# Altium PCB NetworkModule_highspeed V4.PcbDoc (part 1 of 3)
Units mil, origin at the board's own origin, x right, y up, seen from the top; angles counter-clockwise.
Board outline 826.77 x 1421.26 mil, 6 copper layers (Top, GND, Inner3, Inner4, PWR, Bottom), stack 29.136 mil thick; 111 components, 125 nets, 539 pads, 464 vias.
Unrouted connection lines stored in the file: 214.
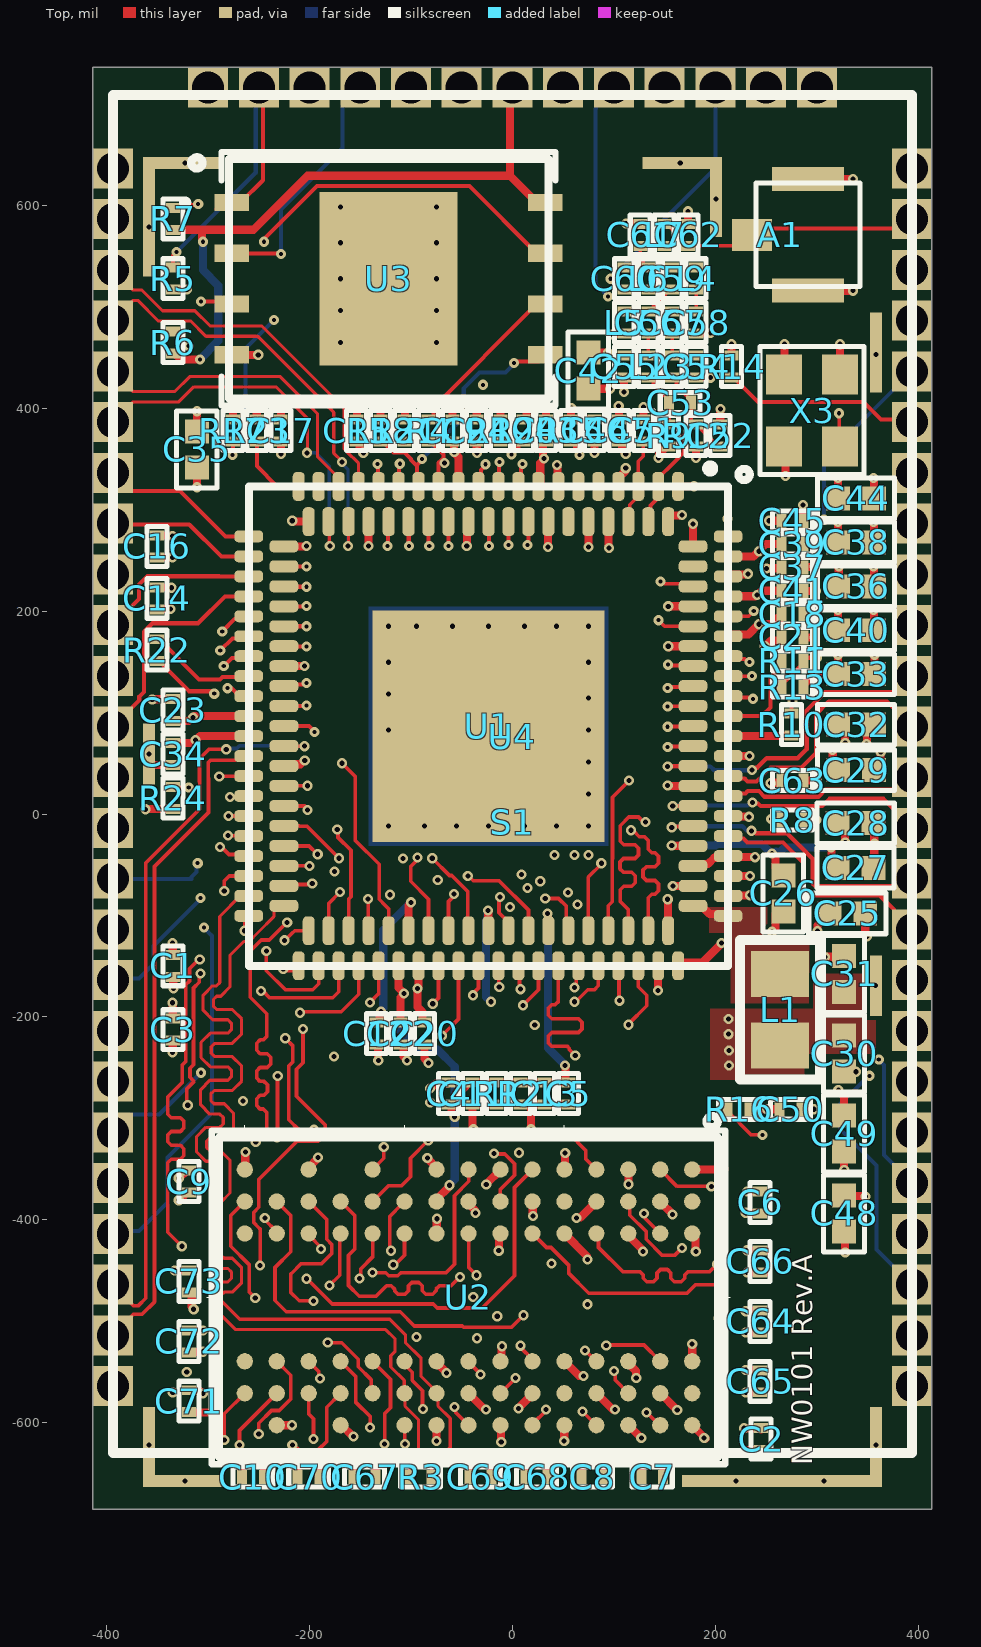
[diagram p0: Top view]
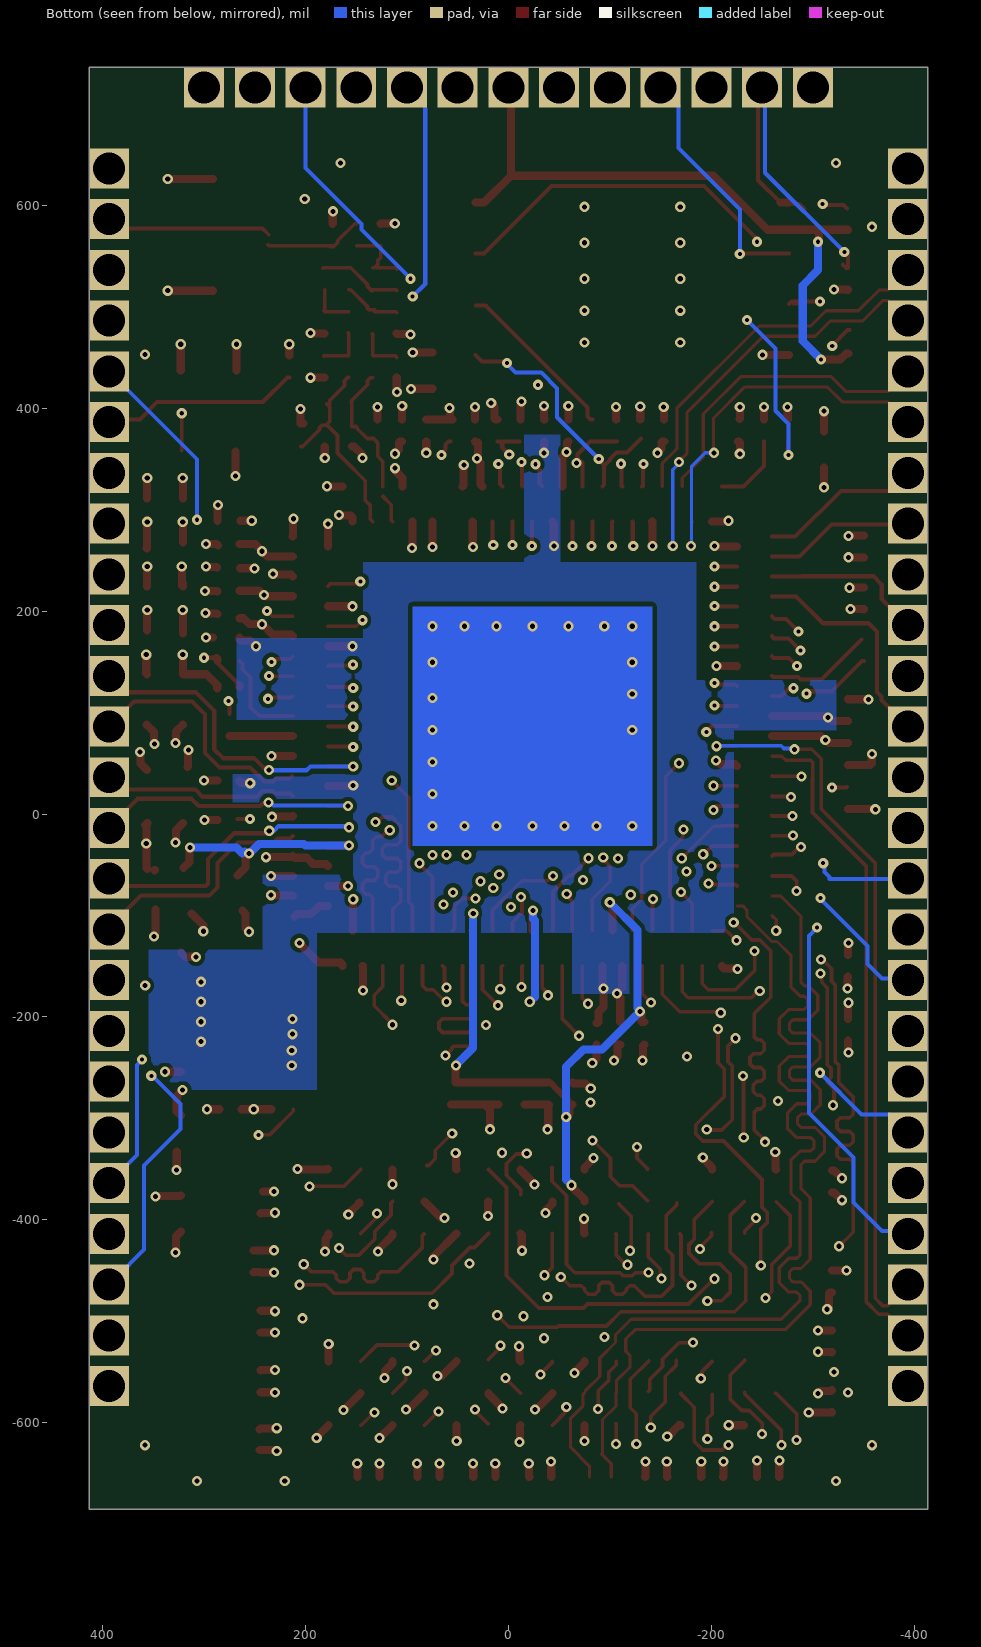
[diagram p1: Bottom view, seen from below]
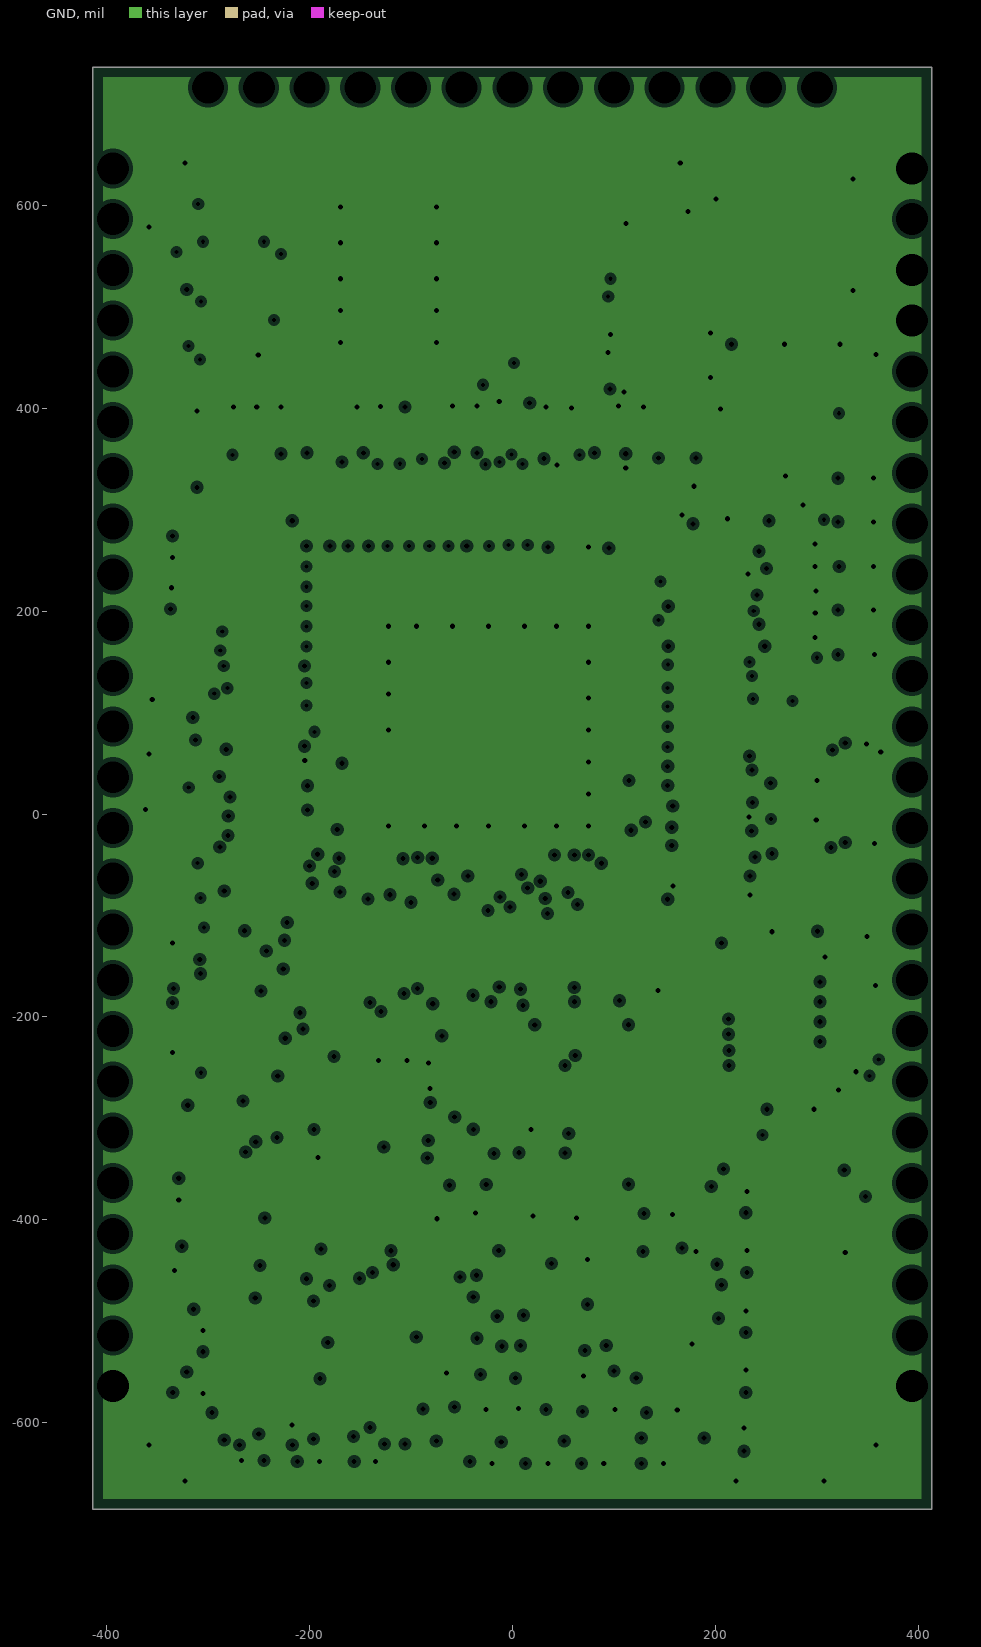
[diagram p2: GND, clearances drawn from the general rule]
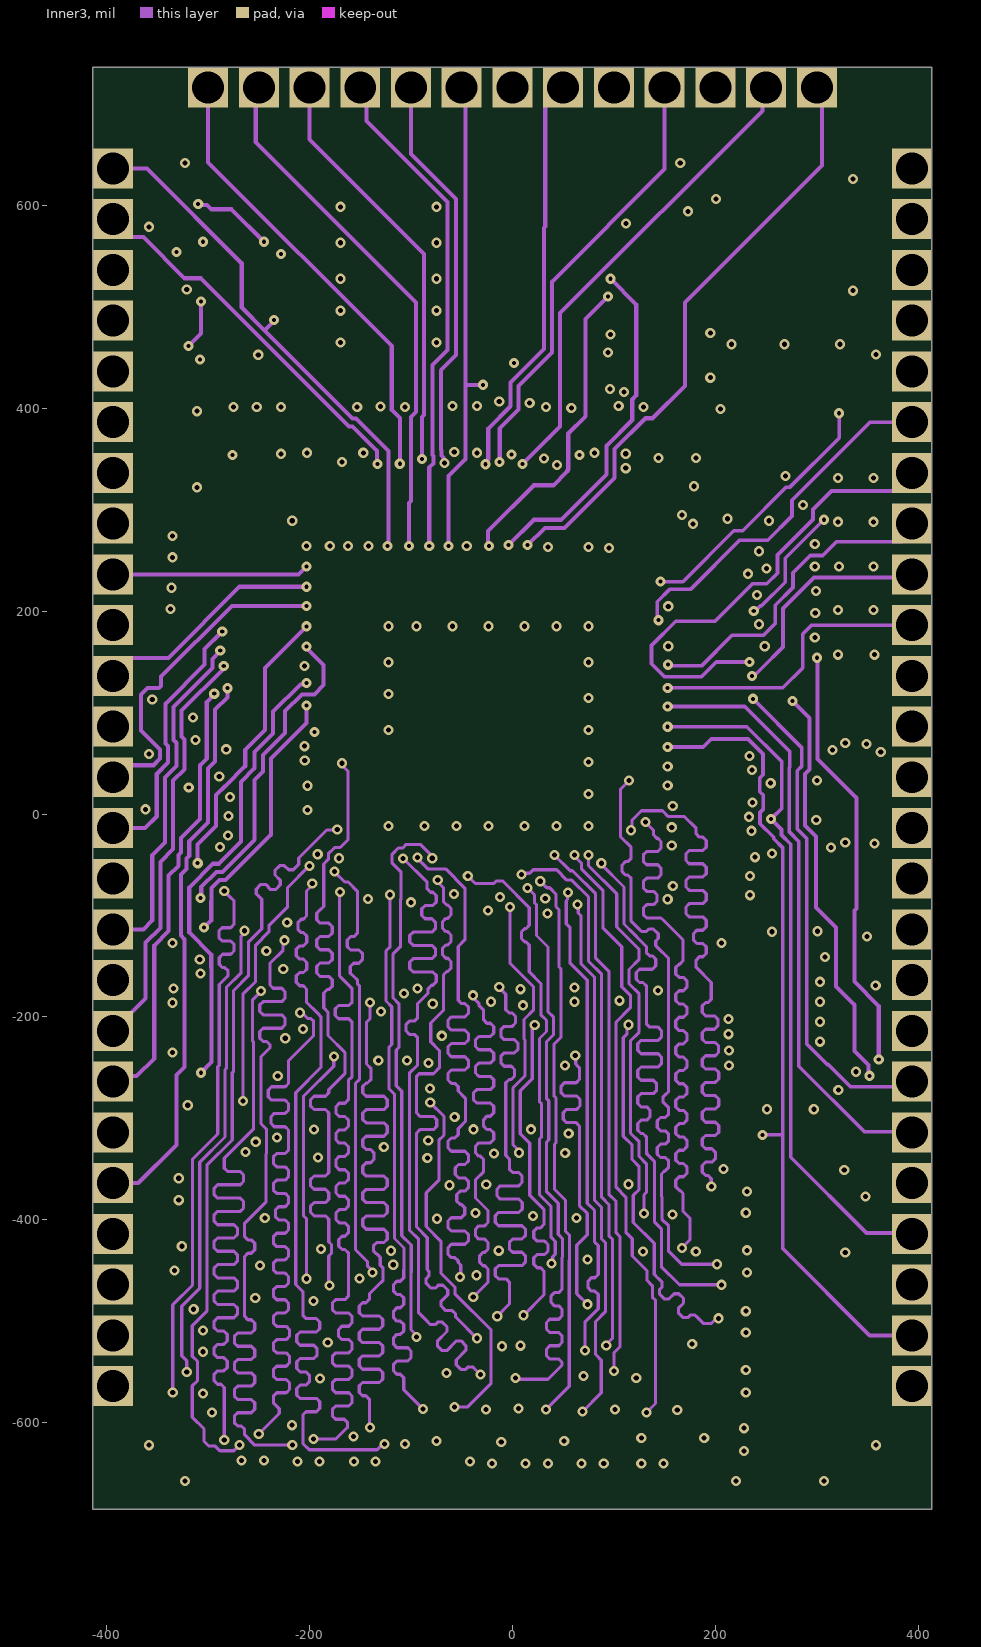
[diagram p3: Inner3]
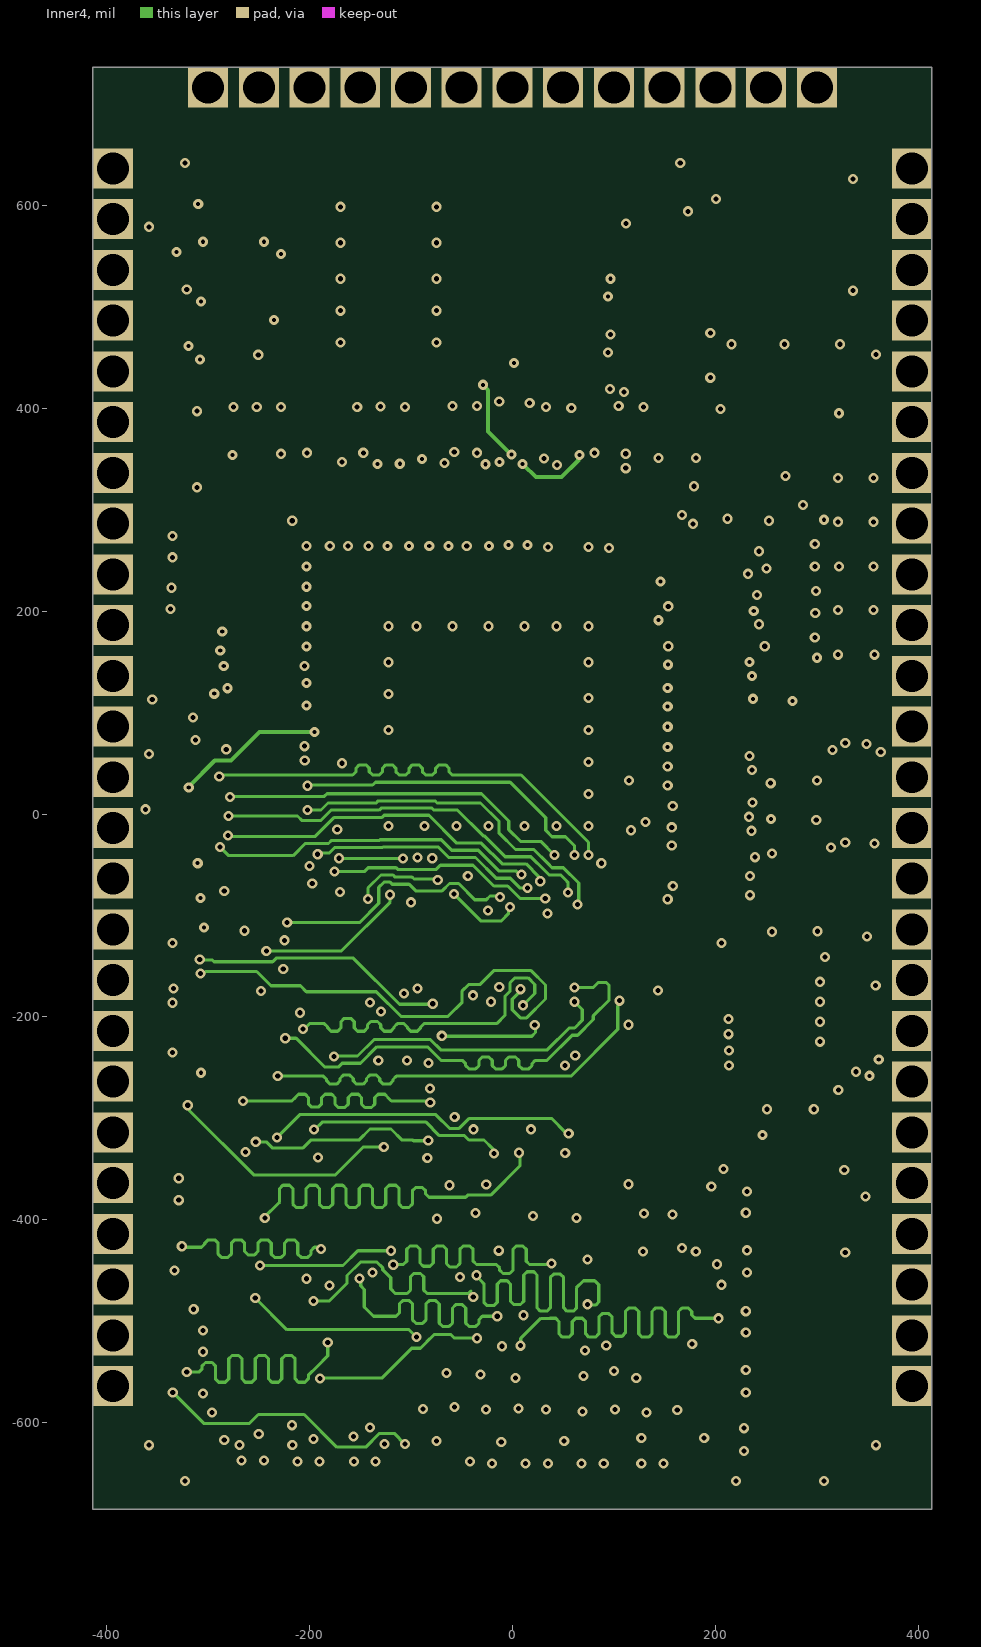
[diagram p4: Inner4]
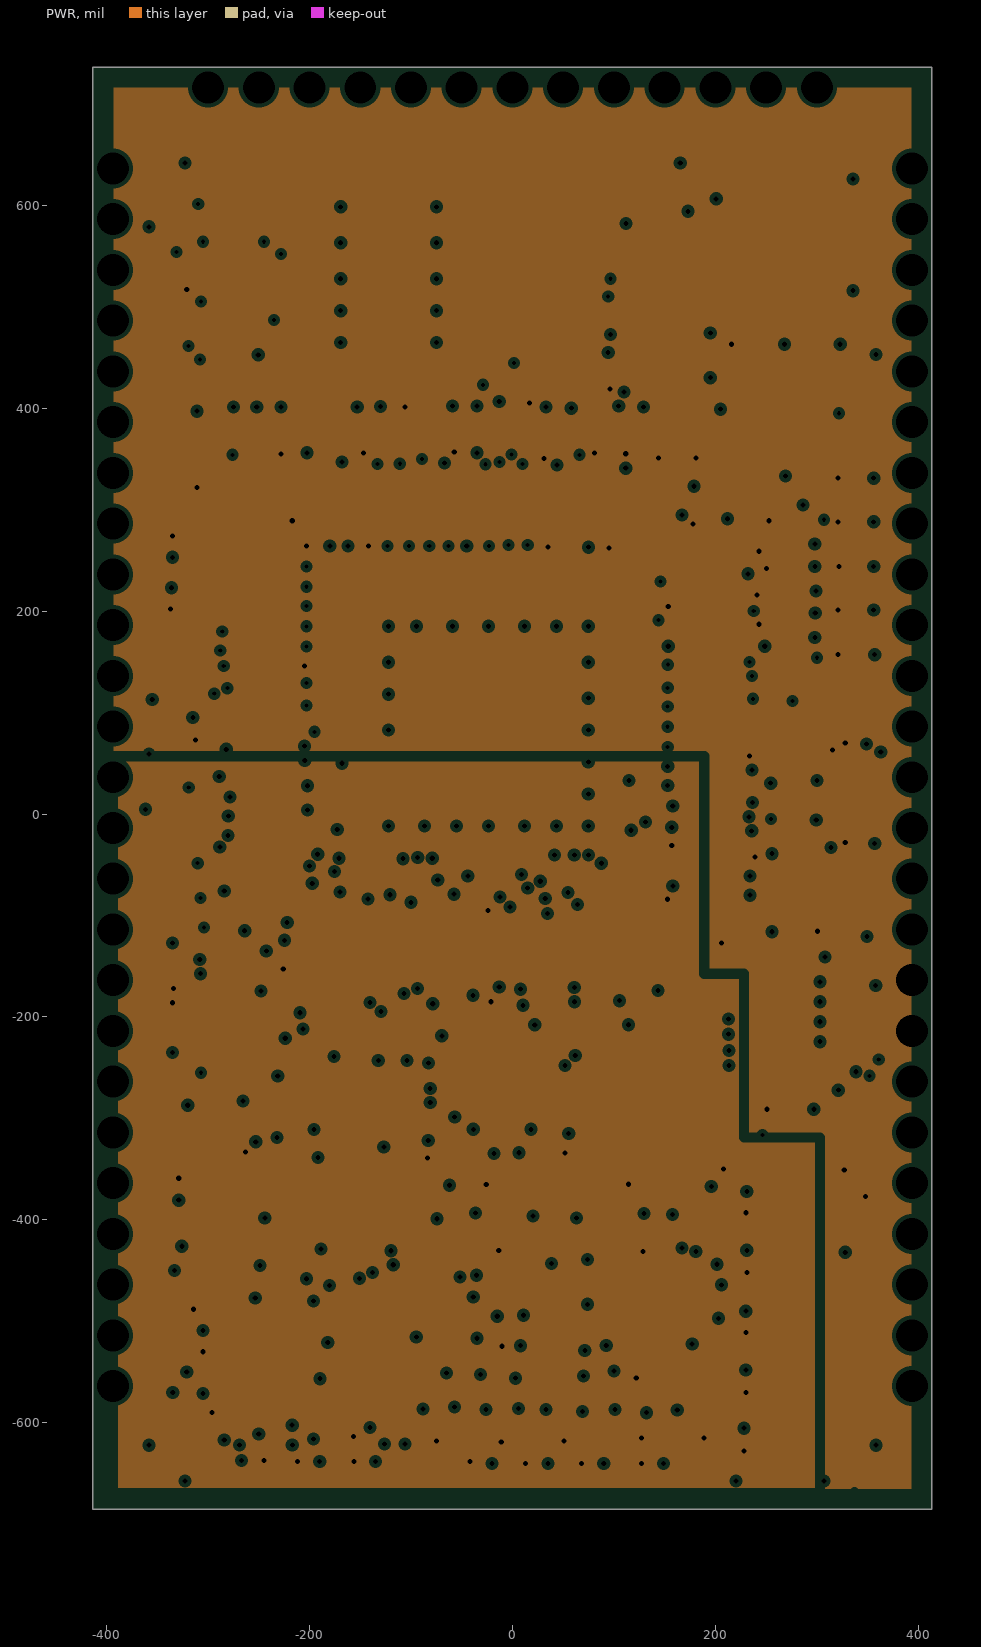
[diagram p5: PWR, clearances drawn from the general rule]

## Layer stack, top to bottom
Solder Mask Top: solder mask 0.4, Solder Resist, Dk 3.5
Top: signal copper 1.35
Dielectric 1: dielectric 2.362, FR-4, Dk 4.3
GND: plane copper 1.378, net GND
Dielectric2: dielectric 3.1, FR-4, Dk 4.3
Inner3: signal copper 1.378
Dielectric3: dielectric 10, FR-4, Dk 4.3
Inner4: signal copper 1.378
Dielectric4: dielectric 3.1, FR-4, Dk 4.3
PWR: plane copper 1.378, net 3V3
Dielectric5: dielectric 2.362, FR-4, Dk 4.3
Bottom: signal copper 1.35
Solder Mask Bottom: solder mask 0.4, Solder Resist, Dk 3.5

## Board outline
-413.39,736.22 413.39,736.22 413.39,-685.04 -413.39,-685.04

## Design rules (kind name [scope] priority, off if disabled: settings)
BoardOutlineClearance [All] p1: gap=4 ignorepadtopadclearanceinfootprint=FALSE
Clearance "Clearance - Default - DEFAULT - Net" [All] p1: gap=4 ignorepadtopadclearanceinfootprint=FALSE
ComponentClearance [All] p1: gap=0 collisioncheckmode=3 verticalgap=0 showdistances=FALSE
DiffPairsRouting "DiffPairsRouting - DiffPair - DDRCLK" [InDifferentialPair('DDRCLK')] p1: maxlimit=7 minlimit=5 mostfreqgap=5 toplayer_mingap=7 toplayer_prefgap=7 toplayer_minwidth=3.12 toplayer_maxwidth=3.12 toplayer_prefwidth=3.12 impedanceprofiledriven=TRUE impedanceprofileid={2A60CAE8-979D-4617-9CAD-F7D18D3C7651} impedanceprofilevalue=100.000000 maxuncoupledlength=500
DiffPairsRouting "DiffPairsRouting - DiffPair - ETH_R" [InDifferentialPair('ETH_R') or InDifferentialPair('ETH_T')] p2: maxlimit=7 minlimit=5 mostfreqgap=7 toplayer_mingap=7 toplayer_minwidth=3.12 toplayer_maxwidth=3.12 toplayer_prefwidth=3.12 bottomlayer_mingap=7 bottomlayer_minwidth=3.12 bottomlayer_maxwidth=3.12 bottomlayer_prefwidth=3.12 impedanceprofiledriven=TRUE impedanceprofileid={F7A5DDC0-C5B1-46B8-8866-6746753CC466} impedanceprofilevalue=100.000000 maxuncoupledlength=500
DiffPairsRouting "DiffPairsRouting - DiffPair - USB_D" [InDifferentialPair('USB')] p3: maxlimit=5 minlimit=4.5 mostfreqgap=5 toplayer_mingap=5 toplayer_minwidth=3.6 toplayer_maxwidth=3.6 toplayer_prefwidth=3.6 impedanceprofiledriven=TRUE impedanceprofileid={C5FCCC38-FD2C-4A72-8F5C-545B132D70D5} impedanceprofilevalue=90.000000 maxuncoupledlength=500
DiffPairsRouting "DiffPairsRouting - DiffPair - PCIE" [InDifferentialPair('PCIE_R') or InDifferentialPair('PCIE_T') or InDifferentialPair('PCIE_CLK')] p4: maxlimit=5 minlimit=4 mostfreqgap=5 toplayer_mingap=5 toplayer_minwidth=4.09 toplayer_maxwidth=4.09 toplayer_prefwidth=4.09 bottomlayer_mingap=5 bottomlayer_minwidth=4.08 bottomlayer_maxwidth=4.08 bottomlayer_prefwidth=4.08 impedanceprofiledriven=TRUE impedanceprofileid={683894AC-71DA-4711-AA13-E03A25D4E6CD} impedanceprofilevalue=85.000000 maxuncoupledlength=500
HoleSize [All] p1: absolutevalues=TRUE maxlimit=100 minlimit=4 maxpercent=80.000 minpercent=20.000
HoleToHoleClearance "HoleToHoleClearance - Default - DEFAULT" [All] p1: gap=4 allowstackedmicrovias=TRUE
MatchedLengths [InNetClass('DDR')] p1: tolerance=100 checknetsindiffpair=FALSE checkdiffpairvsdiffpair=TRUE checkxsignals=TRUE checkothers=TRUE
MinimumSolderMaskSliver [All] p1: minsoldermaskwidth=3
PlaneClearance [All] p1: clearance=4
PlaneConnect "Default PlaneConnect" [All] p1: planeconnectstyle=Direct reliefexpansion=20 reliefentries=4 reliefconductorwidth=15 reliefairgap=10
PolygonConnect "PolygonConnect - Default SMT" [IsSMTPin] p1: connectstyle=Direct reliefconductorwidth=10 reliefentries=4 polygonreliefangle="45 Angle" airgapwidth=10
PolygonConnect "PolygonConnect - Default Pad" [All] p2: connectstyle=Direct reliefconductorwidth=15 reliefentries=4 polygonreliefangle="45 Angle" airgapwidth=10
ReturnPath "ReturnPath - DDRCLK" [InNetClass('DDRCLK')] p1: impedanceprofileid={2A60CAE8-979D-4617-9CAD-F7D18D3C7651} _gaplimit=0
ReturnPath ReturnPath-DDR [All] p2: impedanceprofileid={722ABB41-7FFB-403E-9E2B-BB6A49F0BD66} _gaplimit=0
ReturnPath "ReturnPath - RF" [All] p3: impedanceprofileid={3401BA53-1A97-405B-B9A4-8C0F8181F371} _gaplimit=0
ReturnPath "ReturnPath - USB" [All] p4: impedanceprofileid={C5FCCC38-FD2C-4A72-8F5C-545B132D70D5} _gaplimit=0
ReturnPath "ReturnPath - PCIE" [All] p5: impedanceprofileid={683894AC-71DA-4711-AA13-E03A25D4E6CD} _gaplimit=0
ReturnPath "ReturnPath - Eth" [InNetClass('ETH')] p6: impedanceprofileid={F7A5DDC0-C5B1-46B8-8866-6746753CC466} _gaplimit=5
RoutingLayers "RoutingLayers - USB" [InNetClass('USB')] p1: top layer_v5=TRUE mid layer 1_v5=FALSE mid layer 2_v5=FALSE bottom layer_v5=TRUE
RoutingLayers "RoutingLayers - PCIE" [InNetClass('PCIE')] p2: top layer_v5=TRUE mid layer 1_v5=FALSE mid layer 2_v5=FALSE bottom layer_v5=TRUE
RoutingLayers "RoutingLayers - DDRCLK" [InNetClass('DDRCLK')] p3: top layer_v5=TRUE mid layer 1_v5=TRUE mid layer 2_v5=TRUE bottom layer_v5=TRUE
RoutingLayers "RoutingLayers - NetClass - RF" [InNetClass('RF')] p4: top layer_v5=TRUE mid layer 1_v5=FALSE mid layer 2_v5=FALSE bottom layer_v5=FALSE
RoutingLayers "RoutingLayers - NetClass - DDR" [InNetClass('DDR')] p5: top layer_v5=TRUE mid layer 1_v5=TRUE mid layer 2_v5=TRUE bottom layer_v5=TRUE
RoutingLayers "RoutingLayers - ETH" [InNetClass('ETH')] p6: top layer_v5=TRUE mid layer 1_v5=FALSE mid layer 2_v5=FALSE bottom layer_v5=TRUE
RoutingLayers "RoutingLayers - NetClass - Power" [InNetClass('Power')] p7: top layer_v5=TRUE mid layer 1_v5=FALSE mid layer 2_v5=FALSE bottom layer_v5=TRUE
RoutingLayers "RoutingLayers - Net - GND" [InNet('GND')] p8: top layer_v5=TRUE mid layer 1_v5=FALSE mid layer 2_v5=FALSE bottom layer_v5=FALSE
RoutingLayers "RoutingLayers - Default" [All] p9: top layer_v5=TRUE mid layer 1_v5=TRUE mid layer 2_v5=TRUE bottom layer_v5=TRUE
RoutingPriority "RoutingPriority - PCIE" [InNetClass('PCIE')] p1: routingpriority=5
RoutingPriority "RoutingPriority - USB" [InNetClass('USB')] p2: routingpriority=5
RoutingPriority "RoutingPriority - ETH" [InNetClass('ETH')] p3: routingpriority=5
RoutingPriority "RoutingPriority - DDRCLK" [InNetClass('DDRCLK')] p4: routingpriority=5
RoutingPriority "RoutingPriority - DDR" [InNetClass('DDR')] p5: routingpriority=3
RoutingPriority "RoutingPriority - Default" [All] p6: routingpriority=0
RoutingVias "RoutingVias - Default" [All] p1: holewidth=4 width=10 viastyle="Through Hole" minholewidth=4 minwidth=10 maxholewidth=4 maxwidth=10
SolderMaskExpansion "SolderMaskExpansion from CAM settings" [All] p1: expansion=2 istentingtop=FALSE
Width "Width - NetClass -RF" [InNetClass('RF')] p1: maxlimit=6 minlimit=3 preferedwidth=10 toplayer_prefwidth=3.63 impedanceprofiledriven=TRUE impedanceprofileid={3401BA53-1A97-405B-B9A4-8C0F8181F371} impedanceprofilevalue=50.000000 minimp=50.000000 maximp=50.000000 favimp=50.000000
Width "Width - NetClass - DDR" [InNetClass('DDR')] p2: maxlimit=6 minlimit=3 preferedwidth=3.63 toplayer_minwidth=3.63 toplayer_maxwidth=3.63 midlayer1_minwidth=3.1 midlayer1_maxwidth=3.1 midlayer1_prefwidth=3.1 midlayer2_minwidth=3.09 midlayer2_maxwidth=3.09 midlayer2_prefwidth=3.09 impedanceprofiledriven=TRUE impedanceprofileid={722ABB41-7FFB-403E-9E2B-BB6A49F0BD66} impedanceprofilevalue=50.000000 minimp=50.000000 maximp=50.000000 favimp=50.000000
Width "Width - Net - GND" [InNet('GND')] p3: maxlimit=10 minlimit=4 preferedwidth=8 minimp=50.000000 maximp=50.000000 favimp=50.000000
Width "Width - NetClass - Power" [InNetClass('Power')] p4: maxlimit=10 minlimit=4 preferedwidth=8 minimp=50.000000 maximp=50.000000 favimp=50.000000
Width "Width - DEFAULT" [All] p5: maxlimit=10 minlimit=3 preferedwidth=4 minimp=50.000000 maximp=50.000000 favimp=50.000000
21 further rules are at their usual default settings.

## Classes and differential pairs
component class BGA: U2
net class DDRCLK: DDR_CLK_N DDR_CLK_P
net class ETH: ETH_RN ETH_RP ETH_TN ETH_TP
net class PCIE: PCIE_CKN PCIE_CKP PCIE_RXN PCIE_RXP PCIE_TXN PCIE_TXP
net class USB: USB_D+ USB_D-
net class DDR: DDR_A0 DDR_A1 DDR_A2 DDR_A3 DDR_A4 DDR_A5 DDR_A6 DDR_A7 DDR_A8 DDR_A9 DDR_A10 DDR_A11 DDR_A12 DDR_A13 DDR_BA0 DDR_BA1 DDR_BA2 DDR_CAS DDR_CKE DDR_CS DDR_D0 DDR_D1 DDR_D2 DDR_D3 DDR_D4 DDR_D5 DDR_D6 DDR_D7 DDR_D8 DDR_D9 DDR_D10 DDR_D11 DDR_D12 DDR_D13 DDR_D14 DDR_D15 DDR_LDM DDR_LDQS DDR_ODT DDR_RAS DDR_UDM DDR_UDQS DDR_WE
net class RF: ANT_OUT RF_DIFF+ RF_DIFF- RF_HP+ RF_HP- RF_LP RF_LP+ RF_LP- RF_NOTCH
net class Power: 1V2 1V8 3V3 DDR_1V8 DDR_VREF LXBK VDD_FLASH
component class WIFI: A1 C36 C37 C38 C39 C40 C41 C42 C43 C44 C45 C46 C47 C48 C49 C50 C51 C52 C53 C54 C55 C56 C57 C58 C59 C60 C61 C62 L2 L3 L4 L5 L6 L7 R9 R12 X3
component class USB_PCIE: C32 C33 C34 C35 C63 R16 R24
component class POWER: C18 C19 C20 C21 C22 C23 C24 C25 C27 C28 C29 C30 C31 L1 U1
component class MISC: R4 R5 R7 R8 R10 R11 R13 R14 R15 R17 R18 R19 R20 R21 U3
component class MEMORY: C1 C2 C3 C5 C6 C7 C8 C9 C10 C11 C64 C65 C66 C67 C68 C69 C70 C71 C72 C73 R1 R2 R3 U2
component class INTERFACE: U4
component class ETH_JTAG_SD: C14 C15 C16 C17 R22 R23
differential pair PCIE_CLK: +PCIE_CKP -PCIE_CKN
differential pair PCIE_R: +PCIE_RXP -PCIE_RXN
differential pair PCIE_T: +PCIE_TXP -PCIE_TXN
differential pair DDRCLK: +DDR_CLK_P -DDR_CLK_N
differential pair ETH_R: +ETH_RP -ETH_RN
differential pair ETH_T: +ETH_TP -ETH_TN
differential pair USB: +USB_D+ -USB_D-

## Components (designator, comment, footprint, x,y, rotation, side; value= is the part's Value field where it differs from the comment)
A1 "CONMHF1-SMD-G-T" CONMHF1-SMD-G-T 291.34,570.87 r0 top locked
C1 "CAP0201-104-16V-X7R" RC0201 -334.65,-149.61 r90 top value="0.1uF 16V X7R"
C2 "CAP0201-104-16V-X7R" RC0201 245.08,-616.14 r90 top value="0.1uF 16V X7R"
C3 "CAP0201-104-16V-X7R" RC0201 -334.65,-212.6 r270 top value="0.1uF 16V X7R"
C4 "CAP0201-104-16V-X7R" RC0201 -62.99,-275.59 r90 top value="0.1uF 16V X7R"
C5 "CAP0201-104-16V-X7R" RC0201 55.12,-275.59 r270 top value="0.1uF 16V X7R"
C6 "CAP0201-104-16V-X7R" RC0201 244.09,-382.87 r90 top value="0.1uF 16V X7R"
C7 "CAP0201-104-16V-X7R" RC0201 137.8,-653.54 r0 top value="0.1uF 16V X7R"
C8 "CAP0201-104-16V-X7R" RC0201 78.74,-653.54 r0 top value="0.1uF 16V X7R"
C9 "CAP0201-104-16V-X7R" RC0201 -318.9,-362.2 r270 top value="0.1uF 16V X7R"
C10 "CAP0201-104-16V-X7R" RC0201 -255.91,-653.54 r180 top value="0.1uF 16V X7R"
C11 "CAP0201-104-16V-X7R" RC0201 -39.37,-275.59 r90 top value="0.1uF 16V X7R"
C12 "CAP0201-104-16V-X7R" RC0201 -133.86,-216.54 r270 top value="0.1uF 16V X7R"
C13 "CAP0201-104-16V-X7R" RC0201 31.5,-275.59 r270 top value="0.1uF 16V X7R"
C14 "CAP0201-104-16V-X7R" RC0201 -350.39,212.6 r90 top value="0.1uF 16V X7R"
C15 "CAP0201-104-16V-X7R" RC0201 -153.54,377.95 r90 top value="0.1uF 16V X7R"
C16 "CAP0201-104-16V-X7R" RC0201 -350.39,263.78 r270 top value="0.1uF 16V X7R"
C17 "CAP0201-104-16V-X7R" RC0201 -228.35,377.95 r90 top value="0.1uF 16V X7R"
C18 "CAP0201-104-16V-X7R" RC0201 276,197 r0 top value="0.1uF 16V X7R"
C19 "CAP0201-104-16V-X7R" RC0201 -59.06,377.95 r90 top value="0.1uF 16V X7R"
C20 "CAP0201-104-16V-X7R" RC0201 -86.61,-216.54 r270 top value="0.1uF 16V X7R"
C21 "CAP0201-104-16V-X7R" RC0201 276,174 r0 top value="0.1uF 16V X7R"
C22 "CAP0201-104-16V-X7R" RC0201 -110.24,-216.54 r270 top value="0.1uF 16V X7R"
C23 "CAP0201-104-16V-X7R" RC0201 -334.65,102.36 r90 top value="0.1uF 16V X7R"
C24 "CAP0201-104-16V-X7R" RC0201 -35.43,377.95 r90 top value="0.1uF 16V X7R"
C25 "CAP0402-105-6.3V-X7R" RC0402 330,-98 r0 top value="1uF 16V X7R"
C26 "CAP0402-475-10V-X5R" RC0402 267,-78.28 r270 top value="4.7uF 10V X5R"
C27 "CAP0402-105-6.3V-X7R" RC0402 338,-53 r0 top value="1uF 16V X7R"
C28 "CAP0402-105-6.3V-X7R" RC0402 338.28,-9 r0 top value="1uF 16V X7R"
C29 "CAP0402-105-6.3V-X7R" RC0402 338.58,43.31 r0 top value="1uF 16V X7R"
C30 "CAP0402-475-10V-X5R" RC0402 326.77,-236.22 r270 top value="4.7uF 10V X5R"
C31 "CAP0402-475-10V-X5R" RC0402 326.77,-157.48 r90 top value="4.7uF 10V X5R"
C32 "CAP0402-475-10V-X5R" RC0402 338.72,88 r0 top value="4.7uF 10V X5R"
C33 "CAP0402-475-10V-X5R" RC0402 338.58,137.8 r0 top value="4.7uF 10V X5R"
C34 "CAP0201-104-16V-X7R" RC0201 -334.65,59.06 r270 top value="0.1uF 16V X7R"
C35 "CAP0402-475-10V-X5R" RC0402 -311,359.28 r90 top value="4.7uF 10V X5R"
C36 "CAP0402-105-6.3V-X7R" RC0402 338.58,224.41 r0 top value="1uF 16V X7R"
C37 "CAP0201-101-16V-X7R" RC0201 276,243 r0 top value="100pF 16V X7R"
C38 "CAP0402-105-6.3V-X7R" RC0402 338.58,267.72 r0 top value="1uF 16V X7R"
C39 "CAP0201-101-16V-X7R" RC0201 276,266 r0 top value="100pF 16V X7R"
C40 "CAP0402-105-6.3V-X7R" RC0402 338.58,181.1 r0 top value="1uF 16V X7R"
C41 "CAP0201-101-16V-X7R" RC0201 276,220 r0 top value="100pF 16V X7R"
C42 "CAP0402-105-6.3V-X7R" RC0402 74.8,437.01 r90 top value="1uF 16V X7R"
C43 "CAP0201-101-16V-X7R" RC0201 33,378 r90 top value="100pF 16V X7R"
C44 "CAP0402-105-6.3V-X7R" RC0402 338.58,311.02 r0 top value="1uF 16V X7R"
C45 "CAP0201-101-16V-X7R" RC0201 276,289 r0 top value="100pF 16V X7R"
C46 "CAP0201-101-16V-X7R" RC0201 81,378 r90 top value="100pF 16V X7R"
C47 "CAP0201-101-16V-X7R" RC0201 105,378 r90 top value="100pF 16V X7R"
C48 "CAP0402-105-6.3V-X7R" RC0402 326.77,-393.7 r270 top value="1uF 16V X7R"
C49 "CAP0402-475-10V-X5R" RC0402 326.77,-314.96 r90 top value="4.7uF 10V X5R"
C50 "CAP0201-100-25V-NP0" RC0201 274,-291 r0 top value="10pF 25V NP0"
C51 "CAP0201-020-25V-NP0" RC0201 129,378 r270 top value="2pF 25V NP0"
C52 "CAP0201-020-25V-NP0" RC0201 204.72,373 r90 top value="2pF 25V NP0"
C53 "CAP0201-NOP" RC0201 165.35,405.51 r0 top value=NOP
C54 "CAP0201-NOP" RC0201 181.1,440.94 r270 top value=NOP
C55 "CAP0201-NOP" RC0201 110.24,440.94 r270 top value=NOP
C56 "CAP0201-100-25V-NP0" RC0201 133.86,484.25 r270 top value="10pF 25V NP0"
C57 "CAP0201-100-25V-NP0" RC0201 157.48,484.25 r270 top value="10pF 25V NP0"
C58 "CAP0201-1R2-25V-NP0" RC0201 181.1,484.25 r270 top value="1.2PF 25V NP0"
C59 "CAP0201-1R2-25V-NP0" RC0201 157.48,527.56 r270 top value="1.2PF 25V NP0"
C60 "CAP0201-090-100V-NP0" RC0201 110.24,527.56 r270 top value="9pF 25V NP0"
C61 "CAP0201-020-25V-NP0" RC0201 125.98,570.87 r90 top value="2pF 25V NP0"
C62 "CAP0201-020-25V-NP0" RC0201 173.23,570.87 r90 top value="2pF 25V NP0"
C63 "CAP0201-104-16V-X7R" RC0201 276,33 r180 top value="0.1uF 16V X7R"
C64 "CAP0201-104-16V-X7R" RC0201 244.09,-500 r90 top value="0.1uF 16V X7R"
C65 "CAP0201-104-16V-X7R" RC0201 244.09,-559.06 r90 top value="0.1uF 16V X7R"
C66 "CAP0201-104-16V-X7R" RC0201 244.09,-440.94 r90 top value="0.1uF 16V X7R"
C67 "CAP0201-104-16V-X7R" RC0201 -145.67,-653.54 r0 top value="0.1uF 16V X7R"
C68 "CAP0201-104-16V-X7R" RC0201 23.62,-653.54 r0 top value="0.1uF 16V X7R"
C69 "CAP0201-104-16V-X7R" RC0201 -31.5,-653.54 r0 top value="0.1uF 16V X7R"
C70 "CAP0201-104-16V-X7R" RC0201 -200.79,-653.54 r0 top value="0.1uF 16V X7R"
C71 "CAP0201-104-16V-X7R" RC0201 -318.9,-578.74 r90 top value="0.1uF 16V X7R"
C72 "CAP0201-104-16V-X7R" RC0201 -318.9,-519.68 r90 top value="0.1uF 16V X7R"
C73 "CAP0201-104-16V-X7R" RC0201 -318.9,-460.63 r90 top value="0.1uF 16V X7R"
L1 "IND0805_2.2U_1.9A" RC0805 263.78,-192.91 r270 top value="2.2uH 1.9A"
L2 "IND0201_1.5N_600MA" RC0201 133.86,440.94 r90 top value=1.5nH
L3 "IND0201_1.5N_600MA" RC0201 157.48,440.94 r90 top value=1.5nH
L4 "IND0201_2.5N_500MA" RC0201 181.1,527.56 r90 top value=2.5nH
L5 "IND0201_2.5N_500MA" RC0201 110.24,484.25 r270 top value=2.5nH
L6 "IND0201_1.8N_200MA" RC0201 133.86,527.56 r90 top value="1.8nH 200mA"
L7 "IND0201_1.5N_600MA" RC0201 149.61,570.87 r90 top value=1.5nH
R1 "RES0201-1K00" RC0201 -15.75,-275.59 r270 top value="1K00 1% 1/20W"
R2 "RES0201-1K00" RC0201 7.87,-275.59 r90 top value="1K00 1% 1/20W"
R3 "RES0201-100R" RC0201 -90.55,-653.54 r0 top value="100R 1% 1/20W"
R4 "RES0201-22R0" RC0201 -82.68,377.95 r90 top value="22R0 1% 1/20W"
R5 "RES0201-4K70" RC0201 -334.65,527.56 r270 top value="4K70 1% 1/20W"
R6 "RES0201-10K0" RC0201 -334.65,464.57 r270 top value="10K0 1% 1/20W"
R7 "RES0201-10K0" RC0201 -334.65,586.61 r270 top value="10K0 1% 1/20W"
R8 "RES0201-4K70" RC0201 276,-6 r180 top value="4K70 1% 1/20W"
R9 "RES0201-50R0" RC0201 154,372.99 r270 top value="50R 1% 0.075W"
R10 "RES0201-22R0" RC0201 275,88 r270 top value="22R0 1% 1/20W"
R11 "RES0201-22R0" RC0201 276,151 r0 top value="22R0 1% 1/20W"
R12 "RES0201-50R0" RC0201 181.1,373 r270 top value="50R 1% 0.075W"
R13 "RES0201-10K0" RC0201 275.89,125 r0 top value="10K0 1% 1/20W"
R14 "RES0201-4K70" RC0201 216,441 r90 top value="4K70 1% 1/20W"
R15 "RES0201-4K70" RC0201 57,378 r270 top value="4K70 1% 1/20W"
R16 "RES0201-10K0" RC0201 223,-291 r0 top value="10K0 1% 1/20W"
R17 "RES0201-4K70" RC0201 -275.59,377.95 r270 top value="4K70 1% 1/20W"
R18 "RES0201-4K70" RC0201 -129.92,377.95 r270 top value="4K70 1% 1/20W"
R19 "RES0201-NOP" RC0201 -11.81,377.95 r270 top value=NOP
R20 "RES0201-4K70" RC0201 11,378 r270 top value="4K70 1% 1/20W"
R21 "RES0201-4K70" RC0201 -106.3,377.95 r270 top value="4K70 1% 1/20W"
R22 "RES0201-22R0" RC0201 -350.39,161.42 r90 top value="22R0 1% 1/20W"
R23 "RES0201-24K3" RC0201 -251.97,377.95 r90 top value="24K3 1% 1/20W"
R24 "RES0201-5K10" RC0201 -334.65,15.75 r270 top value="5K10 1% 1/20W"
S1 "O2S-SHIELD" O2S-SHIELD 3.94,-3.94 r0 top locked
U1 "MT7688AN" DR-QFN-128 -23.62,86.61 r270 top locked
U2 "W971GG6KB" TWBGA-84_8X12P5_ISI -43.31,-476.38 r270 top locked
U3 "W25Q256" WIN_E-8_WIN -122.05,527.56 r0 top locked
U4 "OMEGA2S-PCB" OMEGA2S+PCB 0,236.22 r0 top locked
X3 "R2520-40.000-12-F-1010-TR-NS1" R2520-40.000-12-F-1010-TR-NS1 295.28,397.64 r270 top value=40Mhz

## Footprints (in the part's own frame and the unit in brackets; to place one, negate y for a bottom-side part, rotate by r counter-clockwise, add the part's x,y. Pads: shape width x height; smd on the part's side, far side on the other; paste and mask are expansions set on the pad)
CONMHF1-SMD-G-T [mm]
  rect 1x0.8 smd: 1(-1.4,0)
  rect 1.8x0.6 smd: 2(0,-1.4) 3(0,1.4)
  silkscreen extent -1.3,-1.3 1.3,1.3
DR-QFN-128 [mm]
  rrect70% 0.72x0.3 smd: 1(-6,4.75) 2(-5.12,4.5) 3(-6,4.25) 4(-5.12,4) 5(-6,3.75) 6(-5.12,3.5) 7(-6,3.25) 8(-5.12,3) 9(-6,2.75) 10(-5.12,2.5) 11(-6,2.25) 12(-5.12,2) 13(-6,1.75) 14(-5.12,1.5) 15(-6,1.25) 16(-5.12,1) 17(-6,0.75) 18(-5.12,0.5) 19(-6,0.25) 20(-5.12,0) 21(-6,-0.25) 22(-5.12,-0.5) 23(-6,-0.75) 24(-5.12,-1) 25(-6,-1.25) 26(-5.12,-1.5) 27(-6,-1.75) 28(-5.12,-2) 29(-6,-2.25) 30(-5.12,-2.5) 31(-6,-2.75) 32(-5.12,-3) 33(-6,-3.25) 34(-5.12,-3.5) 35(-6,-3.75) 36(-5.12,-4) 37(-6,-4.25) 38(-5.12,-4.5) 39(-6,-4.75)
  rrect70% 0.3x0.72 smd: 40(-4.75,-6) 41(-4.5,-5.12) 42(-4.25,-6) 43(-4,-5.12) 44(-3.75,-6) 45(-3.5,-5.12) 46(-3.25,-6) 47(-3,-5.12) 48(-2.75,-6) 49(-2.5,-5.12) 50(-2.25,-6) 51(-2,-5.12) 52(-1.75,-6) 53(-1.5,-5.12) 54(-1.25,-6) 55(-1,-5.12) 56(-0.75,-6) 57(-0.5,-5.12) 58(-0.25,-6) 59(0,-5.12) 60(0.25,-6) 61(0.5,-5.12) 62(0.75,-6) 63(1,-5.12) 64(1.25,-6) 65(1.5,-5.12) 66(1.75,-6) 67(2,-5.12) 68(2.25,-6) 69(2.5,-5.12) 70(2.75,-6) 71(3,-5.12) 72(3.25,-6) 73(3.5,-5.12) 74(3.75,-6) 75(4,-5.12) 76(4.25,-6) 77(4.5,-5.12) 78(4.75,-6) 118(4.75,6) 119(4.5,5.12) 120(4.25,6) 121(4,5.12) 122(3.75,6) 123(3.5,5.12) 124(3.25,6) 125(3,5.12) 126(2.75,6) 127(2.5,5.12) 128(2.25,6) 129(2,5.12) 130(1.75,6) 131(1.5,5.12) 132(1.25,6) 133(1,5.12) 134(0.75,6) 135(0.5,5.12) 136(0.25,6) 137(0,5.12) 138(-0.25,6) 139(-0.5,5.12) 140(-0.75,6) 141(-1,5.12) 142(-1.25,6) 143(-1.5,5.12) 144(-1.75,6) 145(-2,5.12) 146(-2.25,6) 147(-2.5,5.12) 148(-2.75,6) 149(-3,5.12) 150(-3.25,6) 151(-3.5,5.12) 152(-3.75,6) 153(-4,5.12) 154(-4.25,6) 155(-4.5,5.12) 156(-4.75,6)
  rrect70% 0.72x0.3 smd rot 179.99: 79(6,-4.75) 80(5.12,-4.5) 81(6,-4.25) 82(5.12,-4) 83(6,-3.75) 84(5.12,-3.5) 85(6,-3.25) 86(5.12,-3) 87(6,-2.75) 88(5.12,-2.5) 89(6,-2.25) 90(5.12,-2) 91(6,-1.75) 92(5.12,-1.5) 93(6,-1.25) 94(5.12,-1) 95(6,-0.75) 96(5.12,-0.5) 97(6,-0.25) 98(5.12,0) 99(6,0.25) 100(5.12,0.5) 101(6,0.75) 102(5.12,1) 103(6,1.25) 104(5.12,1.5) 105(6,1.75) 106(5.12,2) 107(6,2.25) 108(5.12,2.5) 109(6,2.75) 110(5.12,3) 111(6,3.25) 112(5.12,3.5) 113(6,3.75) 114(5.12,4) 115(6,4.25) 116(5.12,4.5) 117(6,4.75)
  rrect0% 5.8x5.8 smd: 157(0,0)
  silkscreen extent -6.55,-6 6,6.54
O2S-SHIELD [mm]
  rect 0.3x3 smd: 1(-9.2,15.05)
  rect 0.3x1.524 smd: 2(-9.2,1.6) 7(9,-4.2)
  rect 0.3x2 smd: 3(-9.2,-15.75) 6(9,-15.75) 8(9,11.65) 11(5,15.55)
  rect 2x0.3 smd: 4(-8.35,-16.6) 9(-8.35,16.4) 10(4.15,16.4)
  rect 5x0.3 smd: 5(6.65,-16.6)
OMEGA2S+PCB [mm]
  rrect0% 1x1 / inner rect 1x1 / far side rect 1x1 hole 0.8: A1(7.62,12.192) A2(6.35,12.192) A3(5.08,12.192) A4(3.81,12.192) A5(2.54,12.192) A6(1.27,12.192) A7(0,12.192) A8(-1.27,12.192) A9(-2.54,12.192) A10(-3.81,12.192) A11(-5.08,12.192) A12(-6.35,12.192) A13(-7.62,12.192) B1(-10,10.16) B2(-10,8.89) B3(-10,7.62) B4(-10,6.35) B5(-10,5.08) B6(-10,3.81) B7(-10,2.54) B8(-10,1.27) B9(-10,0) B10(-10,-1.27) B11(-10,-2.54) B12(-10,-3.81) B13(-10,-5.08) B14(-10,-6.35) B15(-10,-7.62) B16(-10,-8.89) B17(-10,-10.16) B18(-10,-11.43) B19(-10,-12.7) B20(-10,-13.97) B21(-10,-15.24) B22(-10,-16.51) B23(-10,-17.78) B24(-10,-19.05) B25(-10,-20.32) C1(10,10.16) C2(10,8.89) C3(10,7.62) C4(10,6.35) C5(10,5.08) C6(10,3.81) C7(10,2.54) C8(10,1.27) C9(10,0) C10(10,-1.27) C11(10,-2.54) C12(10,-3.81) C13(10,-5.08) C14(10,-6.35) C15(10,-7.62) C16(10,-8.89) C17(10,-10.16) C18(10,-11.43) C19(10,-12.7) C20(10,-13.97) C21(10,-15.24) C22(10,-16.51) C23(10,-17.78) C24(10,-19.05) C25(10,-20.32)
  silkscreen extent -10,-22 10,12
R2520-40.000-12-F-1010-TR-NS1 [mm]
  rect 1x0.9 smd: 1(-0.9,-0.7) 2(0.9,-0.7) 3(0.9,0.7) 4(-0.9,0.7)
  silkscreen extent -1.6,-1.3 1.6,1.3
RC0201 [mm]
  rect 0.25x0.35 smd: 1(-0.275,0) 2(0.275,0)
  silkscreen extent -0.5,-0.25 0.5,0.25
RC0402 [mm]
  rrect0% 0.6x0.6 smd: 1(-0.45,0) 2(0.45,0)
  silkscreen extent -0.97,-0.51 0.97,0.51
RC0805 [mm]
  rect 1.15x1.45 smd: 1(-0.9,0) 2(0.9,0)
  silkscreen extent -1.75,-1 1.75,1
TWBGA-84_8X12P5_ISI [mil]
  round 16 smd: A1(-125.98,220.47) A2(-94.49,220.47) A3(-62.99,220.47) A7(62.99,220.47) A8(94.49,220.47) A9(125.98,220.47) B1(-125.98,188.98) B2(-94.49,188.98) B3(-62.99,188.98) B7(62.99,188.98) B8(94.49,188.98) B9(125.98,188.98) C1(-125.98,157.48) C2(-94.49,157.48) C3(-62.99,157.48) C7(62.99,157.48) C8(94.49,157.48) C9(125.98,157.48) D1(-125.98,125.98) D2(-94.49,125.98) D3(-62.99,125.98) D7(62.99,125.98) D8(94.49,125.98) D9(125.98,125.98) E1(-125.98,94.49) E2(-94.49,94.49) E3(-62.99,94.49) E7(62.99,94.49) E8(94.49,94.49) E9(125.98,94.49) F1(-125.98,62.99) F2(-94.49,62.99) F3(-62.99,62.99) F7(62.99,62.99) F8(94.49,62.99) F9(125.98,62.99) G1(-125.98,31.5) G2(-94.49,31.5) G3(-62.99,31.5) G7(62.99,31.5) G8(94.49,31.5) G9(125.98,31.5) H1(-125.98,0) H2(-94.49,0) H3(-62.99,0) H7(62.99,0) H8(94.49,0) H9(125.98,0) J1(-125.98,-31.5) J2(-94.49,-31.5) J3(-62.99,-31.5) J7(62.99,-31.5) J8(94.49,-31.5) J9(125.98,-31.5) K2(-94.49,-62.99) K3(-62.99,-62.99) K7(62.99,-62.99) K8(94.49,-62.99) K9(125.98,-62.99) L1(-125.98,-94.49) L2(-94.49,-94.49) L3(-62.99,-94.49) L7(62.99,-94.49) L8(94.49,-94.49) M2(-94.49,-125.98) M3(-62.99,-125.98) M7(62.99,-125.98) M8(94.49,-125.98) M9(125.98,-125.98) N1(-125.98,-157.48) N2(-94.49,-157.48) N3(-62.99,-157.48) N7(62.99,-157.48) N8(94.49,-157.48) P2(-94.49,-188.98) P3(-62.99,-188.98) P7(62.99,-188.98) P8(94.49,-188.98) P9(125.98,-188.98) R1(-125.98,-220.47) R2(-94.49,-220.47) R3(-62.99,-220.47) R7(62.99,-220.47) R8(94.49,-220.47)
  silkscreen extent -179,-258 170,258
WIN_E-8_WIN [mil]
  rect 34x17 smd: 1(-154.5,75) 2(-154.5,25) 3(-154.5,-25) 4(-154.5,-75) 5(154.5,-75) 6(154.5,-25) 7(154.5,25) 8(154.5,75)
  rect 136x171 smd: 9(0,0)
  silkscreen extent -203,-125 164,125

## Part data
A1: "CONN UMC JACK STR SMD", Manufacturer="Linx Technologies Inc.", Part Number=CONMHF1-SMD-G-T, PCB DECAL=CONMHF1-SMD-G-T, Prefered Vender=Digikey, Revision=A, Type=Connector
C1 C2 C3 C4 C5 C6 C7 C8 C9 C10 C11 C12 C13 C14 C15 C16 C17 C18 C19 C20 C21 C22 C23 C24 C34 C63 C64 C65 C66 C67 C68 C69 C70 C71 C72 C73: "CAP CER 0.1UF 16V X7R 0201", Aligni Value=0.1u, Manufacturer="Murata Electronics", Part Number=GRM033Z71C104KE14D, Geometry.Height=0.33mm, PCB DECAL=RC0201, Prefered Vender=Digikey, Revision=A, Type=Capacitor
C25 C27 C28 C29 C36 C38 C40 C42 C44 C48: "CAP CER 1UF 6.3V X7R 0402", Aligni Value=1u, Manufacturer="Murata Electronics", Part Number=GRM155R70J105KA12D, Geometry.Height=0.33mm, PCB DECAL=RC0402, Prefered Vender=Digikey, Revision=A, Type=Capacitor
C26 C30 C31 C32 C33 C35 C49: "CAP CER 4.7UF 10V X5R 0402", Aligni Value=4.7u, Manufacturer="Samsung Electro-Mechanics", Part Number=CL05A475MP5NRNC, Geometry.Height=0.33mm, PCB DECAL=RC0402, Prefered Vender=Digikey, Revision=A, Type=Capacitor
C37 C39 C41 C43 C45 C46 C47: "CAP CER 100PF 16V X7R 0201", Aligni Value=100p, Manufacturer="Walsin Technology Corporation", Part Number=0201B101K160CT, Geometry.Height=0.33mm, PCB DECAL=RC0201, Prefered Vender=Digikey, Revision=A, Type=Capacitor
C50 C56 C57: "CAP CER 10PF 25V C0G/NP0 0201", Aligni Value=10p, Manufacturer="Walsin Technology Corporation", Part Number=0201N100J250CT, Geometry.Height=0.33mm, PCB DECAL=RC0201, Prefered Vender=Digikey, Revision=A, Type=Capacitor
C51 C52 C61 C62: "CAP CER 2PF 25V C0G/NP0 0201", Aligni Value=2p, Manufacturer="Samsung Electro-Mechanics", Part Number=CL03C020BA3GNNC, Geometry.Height=0.33mm, PCB DECAL=RC0201, Prefered Vender=Digikey, Revision=A, Type=Capacitor
C53 C54 C55: "NOP", Aligni Value=12p, Geometry.Height=0mm, Manufacturer=NOP, Part Number=NOP, PCB DECAL=RC0201, Prefered Vender=NOP, Revision=NOP, Type=Capacitor
C58 C59: "CAP CER 1.2PF 25V C0G/NP0 0201", Aligni Value=1.2P, Manufacturer="Murata Electronics", Part Number=GRM0335C1E1R2WA01D, Geometry.Height=0.33mm, PCB DECAL=RC0201, Prefered Vender=Digikey, Revision=A, Type=Capacitor
C60: "CAP CER 9PF 25V C0G 0201", Aligni Value=9p, Manufacturer="TDK Corporation", Part Number=CGA1A2C0G1E090D030BA, Geometry.Height=0.33mm, PCB DECAL=RC0201, Prefered Vender=Digikey, Revision=A, Type=Capacitor
L1: "POWER CHOKE MOLDED 2.2UH 1.9A", Aligni Value=2.2u, Manufacturer="Walsin Technology Corporation", Part Number=WLPH201610M2R2PP, Geometry.Height=1.5mm, PCB DECAL=RC0805, Prefered Vender=Digikey, Revision=A, Type=Inductor
L2 L3 L7: "INDUCTOR FIXED 1.5NH 0201", Aligni Value=1.5n, Manufacturer="Walsin Technology Corporation", Part Number=WLCM0603TGB1N5TB, Geometry.Height=1.5mm, PCB DECAL=RC0201, Prefered Vender=Digikey, Revision=A, Type=Inductor
L4 L5: "FIXED IND 2.5NH 500MA 200MOHM SM", Aligni Value=2.5n, Manufacturer="Murata Electronics", Part Number=LQP03TN2N5B02D, Geometry.Height=1.5mm, PCB DECAL=RC0201, Prefered Vender=Digikey, Revision=A, Type=Inductor
L6: "FIXED IND 1.8NH 200MA 550MOHM SM", Aligni Value=1.8n, Manufacturer="TE Connectivity Passive Product", Part Number=1-2176075-8, Geometry.Height=1.5mm, PCB DECAL=RC0201, Prefered Vender=Digikey, Revision=A, Type=Inductor
R1 R2: "RES 1K OHM 1% 1/20W 0201", Aligni Value=1k, Manufacturer="Stackpole Electronics Inc", Part Number=RMCF0201FT1K00, Geometry.Height=0.6mm, PCB DECAL=RC0201, Prefered Vender=Digikey, Revision=A, Type=Resistor
R3: "RES 100 OHM 1% 1/20W 0201", Aligni Value=100, Manufacturer=Yageo, Part Number=RC0201FR-07100RL, Geometry.Height=0.5mm, PCB DECAL=RC0201, Prefered Vender=Digikey, Revision=A, Type=Resistor
R4 R10 R11 R22: "RES 22 OHM 1% 1/20W 0201", Aligni Value=22, Manufacturer=Yageo, Part Number=RC0201FR-0722RL, Geometry.Height=0.5mm, PCB DECAL=RC0201, Prefered Vender=Digikey, Revision=A, Type=Resistor
R5 R8 R14 R15 R17 R18 R20 R21: "RES 4.7K OHM 1% 1/20W 0201", Aligni Value=4.7k, Manufacturer=Yageo, Part Number=RC0201FR-074K7L, Geometry.Height=0.5mm, PCB DECAL=RC0201, Prefered Vender=Digikey, Revision=A, Type=Resistor
R6 R7 R13 R16: "RES SMD 10K OHM 1% 1/20W 0201", Aligni Value=10k, Manufacturer=Yageo, Part Number=RC0201FR-0710KP, Geometry.Height=0.5mm, PCB DECAL=RC0201, Prefered Vender=Digikey, Revision=A, Type=Resistor
R9 R12: "RES 50 OHM 0.1% 0.075W 0201", Aligni Value=50, Manufacturer="Vishay Dale", Part Number=TNPW020150R0BEED, Geometry.Height=0.5mm, PCB DECAL=RC0201, Prefered Vender=Digikey, Revision=A, Type=Resistor
R19: "NOP", Aligni Value=NOP, Geometry.Height=0mm, Manufacturer=NOP, Part Number=NOP, PCB DECAL=RC0201, Prefered Vender=NOP, Revision=A, Type=Resistor
R23: "RES 24.3K OHM 1% 1/20W 0201", Aligni Value=24.3k, Manufacturer=YAGEO, Part Number=RC0201FR-0724K3L, Geometry.Height=0.6mm, PCB DECAL=RC0201, Prefered Vender=Digikey, Revision=A, Type=Resistor
R24: "RES SMD 5.1K OHM 1% 1/20W 0201", Aligni Value=5.1k, Manufacturer=YAGEO, Part Number=AC0201FR-075K1L, Geometry.Height=0.6mm, PCB DECAL=RC0201, Prefered Vender=Digikey, Revision=A, Type=Resistor
S1: "O2S SHIELD", Manufacturer="RYSE Inc.", Geometry.Height=0mm, Part Number=O2S-SHIELD, PCB DECAL=O2S-SHIELD, Prefered Vender=Digikey, Revision=A, Type="Electronic OEM Component"
U1: "580Mhz 32bits Networking Processor", Manufacturer="MediaTek Inc", Geometry.Height=0mm, Part Number=MT7688AN, PCB DECAL=DR-QFN-128, Type=IC
U4: "RX TXRX MODULE WIFI U.FL SMD", Manufacturer="Onion Corporation", Part Number=OM-O2S, Geometry.Height=0mm, PCB DECAL=OMEGA2S+PCB, Prefered Vender=Digikey, Revision=A, Type="Electronic OEM Component"
X3: "CRYSTAL 40.0000MHZ 12PF SMD", Aligni Value=40Meg, Manufacturer="Raltron Electronics", Geometry.Height=0.9mm, Part Number=R2520-40.000-12-F-1010-TR-NS1, PCB DECAL=R2520-40.000-12-F-1010-TR-NS1, Prefered Vender=Digikey, Revision=A, Type=Crystal
U2: PCB DECAL=TWBGA-84_8X12P5_ISI
U3: PCB DECAL=WIN_E-8_WIN

## Via types
v1: diameter 10, hole 5, Top to Bottom, 398 vias
v2: diameter 10, hole 4, Top to Bottom, 66 vias

## Nets (pads, with @x,y where several pads share a name; then routed paths per layer and width w, separated by ;. In a path a pad name is that pad's centre, name@x,y a point inside that pad or via, vN(x,y) a via of type N, cw(c..) or ccw(c..) an arc to the next point about the centre after c; other vN are vias at no path point)
1V2: C20.1 C21.1 C22.1 C23.1 C24.1 C30.1 C31.1 C63.2 L1.2 U1.22 U1.58 U1.89 U1.91 U1.122 U1.131 U1.145 | length 333.7
  Top w8: C23.1@-334.65,91.54 -319.01,91.54 -315.54,95 v1(-315,95) ; v1@-313.54,96.46 U1.58@-259.84,96.46 ; U1.89@-112.2,-149.6 -112.2,-171.25 -107,-176.46 v1(-107,-177) ; C22.1@-110.24,-204.79 -110.24,-180.69 v1@-107.01,-177.46 ; v1(-93.64,-172.07) -93.64,-171.53 -92.52,-170.41 U1.91@-92.52,-149.6 ; v1@-93.04,-172.39 -93.64,-173 -93.64,-190.29 -88.81,-195.12 -88.81,-204.79 -87.58,-206.02 C20.1@-86.61,-206.02 ; v1(-45,264) -44.62,264.38 -44.62,286.88 U1.22@-43.31,288.19 ; C24.1@-35.43,367.13 -35.22,366.91 -35.22,356.22 v1(-35,356) ; v1(153,28) 153.22,27.78 177.73,27.78 U1.131@177.95,27.56 ; v1@154.53,164.37 155.51,165.36 U1.145@177.95,165.36 ; U1.122@212.6,-61.02 v1(234,-61) ; v1(248.63,165.37) 248.94,165.42 254.63,171.11 264.25,171.11 265.17,172.03 C21.1@265.17,174 ; v1(254.51,30.38) 254.89,30.77 264.25,30.77 265.17,31.69 C63.2@265.17,33
  other v1: 213.57,-248 213.57,-233 303.15,-224.41 213,-217 303.15,-204.72 213,-202 303.15,-185.04 303.15,-165.35 153.54,165.35
1V8: C1.1 C2.1 C3.1 C6.1 C7.1 C8.1 C9.1 C10.1 C26.1 C27.1 C64.1 C65.1 C66.1 C67.1 C68.1 C69.1 C70.1 C71.1 C72.1 C73.1 U1.79 U1.98 U1.116 U1.125 U2.A1 U2.A9 U2.C1 U2.C3 U2.C7 U2.C9 U2.E1 U2.E9 U2.G1 U2.G3 U2.G7 U2.G9 U2.J1 U2.J9 U2.M9 U2.R1 | length 966
  Top w8: v1(-335,-186) -334.82,-186.18 -334.82,-201.59 C3.1@-334.65,-201.77 ; C1.1@-334.65,-160.43 -334.32,-160.76 -334.32,-171.68 v1(-334,-172) ; v1(-328.9,-359) -328.49,-359 -320.87,-351.38 C9.1@-318.9,-351.38 ; C71.1@-318.9,-589.57 -318.68,-589.78 -296.22,-589.78 v1(-296,-590) ; C72.1@-318.9,-530.51 -318.64,-530.26 -305.26,-530.26 v1(-305,-530) ; C73.1@-318.9,-471.46 -316.93,-471.46 -316.01,-472.38 -316.01,-485.64 -314.13,-487.52 v1(-314.13,-488.06) ; U2.R1@-263.78,-350.39 -263.3,-349.92 -263.3,-333.35 v1(-262.92,-332.97) ; C10.1@-245.08,-653.54 -245.04,-653.5 v1(-245,-637) v1(-245,-637) ; v1(-225.9,-152.63) -225.52,-152.25 -212.53,-152.25 -210.63,-150.35 U1.79@-210.63,-149.6 ; v1(-212,-638) -211.81,-638.19 -211.81,-653.35 C70.1@-211.61,-653.54 ; U2.M9@-169.29,-602.36 -168.18,-602.36 -157.08,-613.46 v1(-156.54,-613.46) ; C67.1@-156.5,-653.54 -156.25,-653.3 -156.25,-638.25 v1(-156,-638) ; v1(-83.9,-339) -83.9,-339.54 -74.8,-348.64 U2.J1@-74.8,-350.39 ; v1(-75,-618) -74.9,-617.9 -74.9,-602.46 U2.J9@-74.8,-602.36 ; C69.1@-42.32,-653.54 -42.16,-653.38 -42.16,-638.16 v1(-42,-638) ; v1(-25.8,-365) -25.8,-364.69 -11.81,-350.7 U2.G1@-11.81,-350.39 ; v1(-24.09,-95) -23.85,-95.23 -23.85,-114.73 U1.98@-23.62,-114.96 ; v1(-13.51,-430.39) -13.13,-430 -13.13,-414.71 U2.G3@-11.81,-413.39 ; U2.G9@-11.81,-602.36 -11.38,-602.79 -11.38,-618.62 v1(-11,-619) ; U2.G7@-11.81,-539.37 -10.83,-538.39 -10.83,-524.93 v1(-10.45,-524.55) ; C68.1@12.8,-653.54 12.9,-653.44 12.9,-640.1 v1(13,-640) ; v1(51,-618) 51.09,-617.91 51.09,-602.45 U2.E9@51.18,-602.36 ; U2.E1@51.18,-350.39 51.62,-349.96 51.62,-334.38 v1(52,-334) ; C8.1@67.91,-653.54 67.96,-653.5 v1(68,-640) v1(68,-640) ; U2.C9@114.17,-602.36 114.27,-602.36 126.91,-615 v1(127,-615) ; U2.C7@114.17,-539.37 114.17,-541.53 121.67,-549.03 121.67,-555.42 v1(122.05,-555.8) ; U2.C3@114.17,-413.39 114.17,-415.31 128.28,-429.42 128.28,-430.83 v1(128.66,-431.22) ; U2.C1@114.17,-350.39 114.26,-350.48 114.26,-364.8 v1(114.35,-364.89) ; C7.1@126.97,-653.54 v1(127,-640) ; v1(153,-84) 153.27,-84.27 153.27,-114.69 U1.116@153.54,-114.96 ; v1(157,-31) 157.25,-31.25 177.7,-31.25 U1.125@177.95,-31.49 ; U2.A9@177.16,-602.36 190,-615.2 v1@190,-616 ; U2.A1@178,-350 178.2,-350.2 207.8,-350.2 v1(208,-350) ; v1(228.35,-627.95) 228.89,-627.95 229.87,-626.97 C2.1@245.08,-626.97 ; v1(230,-570) 230.06,-569.94 244.04,-569.94 C65.1@244.09,-569.88 ; v1(230,-511) 230.09,-510.91 244.01,-510.91 C64.1@244.09,-510.83 ; v1(230,-393) 230.35,-393.35 243.74,-393.35 C6.1@244.09,-393.7 ; v1(231,-452) 231.11,-451.89 244.57,-451.89 245.08,-451.38 250.68,-451.38 251.07,-451.77 ; v1(255.72,-39.07) 255.72,-39.15 259.19,-42.62 259.19,-52.75 C26.1@267,-60.57 ; v1(314,-33) 314.38,-33.38 314.38,-47.3 C27.1@320.08,-53
  Bottom w8: v1(-24.09,-95) -24.38,-95.3 -24.38,-103.27 -26,-104.89 -26,-173.61 -26,-180.26 -22.79,-183.47 v1@-22.79,-184.01 ; v1@157.92,-31 200.24,-31 201.68,-29.56 245.67,-29.56 255.18,-39.07 v1(255.72,-39.07) ; v1@259.87,-36.94 262,-39.07 268.07,-33 v1(314,-33)
  other v1: 189,-615 -21,-185
3V3: C14.1 C15.1 C16.1 C17.1 C18.1 C19.1 C25.1 C28.1 C29.1 C32.1 C33.1 C34.1 C35.1 C36.1 C37.1 C38.1 C39.1 C40.1 C41.1 C42.1 C43.1 C44.1 C45.1 C46.1 C47.1 C48.1 C49.1 C50.1 R5.2 R9.2 R12.2 R13.2 R14.2 R16.2 R20.1 R21.1 U1.8 U1.14 U1.15 U1.23 U1.32 U1.38 U1.41 U1.53 U1.60 U1.117 U1.123 U1.124 U1.134 U1.146 U1.149 U1.150 U1.154 U1.155 U4.C17 U4.C18 | length 1211.7
  Top w8: C14.1@-350.39,201.77 -350.28,201.89 -337.11,201.89 v1(-337,202) ; C16.1@-350.39,274.61 -350.09,274.3 -335.3,274.3 v1(-335,274) ; C34.1@-334.65,69.88 -315.76,69.89 -312.81,72.83 v1(-312.27,72.83) ; R5.2@-334.65,516.73 -334.51,516.87 -321.13,516.87 v1(-321,517) ; v1@-313.19,73 -311.56,73 -307.79,76.77 U1.60@-259.84,76.77 ; v1(-311,322) C35.1@-311,341.57 ; v1(-228,355) -228.17,355.17 -228.17,366.2 -227.38,367 C17.1@-226.25,367 ; U1.53@-225.2,145.67 -225.03,145.83 -205.17,145.83 v1(-205,146) ; U1.41@-225.2,263.78 v1@-203.22,263.78 ; v1(-217,289) -216.46,289 -215.65,288.19 U1.38@-200.79,288.19 ; C15.1@-153.54,367.13 -151.58,367.13 -150.65,366.2 -150.65,360.2 -147,356.54 v1(-147,356) ; v1(-142,264) -141.87,264.13 -141.87,288.06 U1.32@-141.73,288.19 ; R21.1@-106.3,388.78 -106,389.08 v1@-106,400 ; C19.1@-59.06,367.13 -58.65,367.13 -57.73,366.2 -57.73,357.01 v1(-57.35,356.63) ; v1@-57.65,356.57 -57.65,356.39 -53.15,351.89 U1.23@-53.15,322.84 ; R20.1@11,388.83 12.97,388.83 13.89,389.75 13.89,401.35 17,404.46 v1(17,405) ; U1.15@25.59,322.84 27.41,324.66 27.41,346.09 31.01,349.68 v1(31.01,350.22) ; v1@30.11,352.65 30.11,366.25 32.08,366.25 C43.1@33,367.17 ; v1(35,263) 35.22,263.22 35.22,287.97 U1.14@35.43,288.19 ; C42.1@74.8,419.29 74.95,419.15 95.85,419.15 v1(96,419) ; v1(81,356) C46.1@81,367.17 ; U1.8@94.49,288.19 94.49,261.51 v1@95,261 ; C47.1@105,367.17 106.97,367.17 107.89,366.25 107.89,359.4 111.7,355.59 v1(111.7,355.05) ; v1(144,351) 144.38,351.38 144.38,354.52 152.03,362.17 R9.2@154,362.17 ; v1(153.54,204.72) U1.149@177.95,204.73 ; U1.117@163.39,-149.6 163.39,-148.28 165.28,-146.38 187.16,-146.38 206,-127.54 v1(206,-127) ; U1.123@177.95,-51.18 179.77,-49.36 192.64,-49.36 198.84,-43.16 210.78,-43.16 U1.124@212.6,-41.34 213.44,-42.18 238.62,-42.18 v1(239,-42.56) ; U1.155@177.95,263.78 v1(178,286) ; v1(181,351) 181.05,351.05 181.05,362.12 R12.2@181.1,362.17 ; U1.146@212.6,175.2 214.42,177.02 232.48,177.02 242.46,187 v1(243,187) 243.38,187.38 255.43,187.38 260.96,192.91 C18.1@264.76,192.91 ; U1.150@212.6,214.57 239.03,214.57 240.46,216 241.54,216 245.54,220 C41.1@265.17,220 ; U1.154@212.6,253.94 237.4,253.94 242.46,259 v1(243,259) 243,259.46 249.54,266 C39.1@265.17,266 ; U1.134@212.6,57.09 v1@233.64,57.05 ; R14.2@216,451.83 v1(216,463) ; R16.2@233.83,-291 v1@249,-291 ; v1(250.38,241.84) 250.76,242.23 C37.1@264.4,242.23 ; v1(251,-291) C50.1@263.17,-291 ; v1(253,289) 264.25,289 C45.1@264.25,288.8 ; R13.2@287,124 287,127.25 297.54,137.8 C33.1@320.87,137.8 320.93,137.86 320.93,156.93 v1(321,157) ; v1(300.72,-115.57) 300.65,-115.51 300.65,-109.63 C25.1@312.28,-98 ; v1(315.33,63.11) 315.72,62.73 315.72,46.96 C29.1@316.41,46.26 ; C28.1@320.57,-9 327.62,-16.05 327.62,-27.62 v1(328,-28) ; C40.1@320.87,178 C40.1@320.87,181.1 320.93,181.17 320.93,200.93 v1(321,201) ; C36.1@320.87,227 C36.1@320.87,224.41 321.62,225.16 321.62,243.62 v1(322,244) ; C38.1@320.87,272 C38.1@320.87,267.72 320.93,267.78 320.93,287.93 v1(321,288) ; C44.1@320.87,316 C44.1@320.87,311.02 320.93,311.09 320.93,330.93 v1(321,331) ; C32.1@321,88 327.62,81.38 327.62,70.38 v1(328,70) ; C48.1@322.84,-375.99 323.47,-376.62 347.62,-376.62 v1(348,-377) ; C49.1@326.93,-332.84 326.89,-332.89 326.89,-350.89 v1(327,-351)
  other v1: 233.68,57.02 241,216 95,262 -203,264 -106,401
ANT_OUT: A1.1 C62.1 L7.2 U4.C2 | length 265
  Top w3.63: L7.2@149.61,581.69 151.57,581.69 168.16,565.11 168.16,563.14 172.3,559 C62.1@176,559 ; C62.1@173.23,560.04 236.04,560.04 A1.1@237,561 ; A1.1@236.22,570.87 242.35,577 381.97,577 U4.C2@393,588.03
DDR_1V8: C11.1 R1.2 | length 48.1
  Top w8: C11.1@-39.74,-286.79 -39.18,-287.34 -39.18,-309.57 -38.55,-310.2 v1(-38.55,-310.74) ; C11.1@-39.37,-286.42 R1.2@-15.75,-286.42
DDR_A0: U1.80 U2.M8 | length 897.4
  Top w3.63: v1(-224.7,-124.46) -224.21,-124.46 -217.57,-117.82 -217.52,-117.82 -214.66,-114.96 U1.80@-200.79,-114.96 ; v1(-216.98,-622) -215.25,-622 -210.44,-626.82 -191.52,-626.82 -183.11,-618.41 -183.11,-584.68 -170,-571.57 U2.M8@-170,-571
  Inner3 w3.1: v1(-224.7,-124.46) -226.02,-125.78 -226.02,-134.1 -239,-147.08 -239,-162 -239,-168.49 -235.72,-171.77 -227.42,-171.77 -224.15,-175.04 -224.15,-181.59 -227.42,-184.87 -245.72,-184.87 -249,-188.14 -249,-194.7 -245.72,-197.97 -227.42,-197.97 -224.15,-201.25 -224.15,-207.8 -227.42,-211.07 -245.72,-211.07 -249,-214.35 -249,-220.9 -245.72,-224.17 -242.28,-224.17 -239,-227.45 -239,-229 -239,-230.48 -247.8,-239.28 -247.8,-305.11 -242.47,-310.45 -242.47,-334.65 -242.77,-334.95 -242.77,-382.03 -258.46,-397.73 -264,-403.27 -264,-416.48 -260.72,-419.75 -257.28,-419.75 -254,-423.03 -254,-429.58 -257.28,-432.85 -260.72,-432.85 -264,-436.13 -264,-495.09 -260.72,-498.36 -257.28,-498.36 -254,-501.64 -254,-508.19 -257.28,-511.46 -270.72,-511.46 -274,-514.74 -274,-521.29 -270.72,-524.56 -257.28,-524.56 -254,-527.84 -254,-534.39 -257.28,-537.67 -270.72,-537.67 -274,-540.94 -274,-547.49 -270.72,-550.77 -257.28,-550.77 -254,-554.04 -254,-560.59 -257.28,-563.87 -270.72,-563.87 -274,-567.14 -274,-573.7 -270.72,-576.97 -257.28,-576.97 -254,-580.25 -254,-586.8 -257.28,-590.07 -270.72,-590.07 -274,-593.35 -274,-599.9 -270.72,-603.17 -267.28,-603.17 -264,-606.45 -264,-608 -264,-611.92 -253.92,-622 v1(-216.98,-622)
DDR_A1: U1.88 U2.M3 | length 949.1
  Top w3.63: v1(-180.43,-464.78) -170.15,-454.5 -170.15,-415.15 U2.M3@-169,-414 ; v1(-168,50) -154.93,36.93 -154.93,-26.07 ; -155,-26 -154.93,-26.07 ; -131.37,-69 -131.37,-56.86 ; U1.88@-122.05,-114.96 -122.05,-93.4 -125.03,-90.42 -131.37,-84.08 -131.37,-76 -131.37,-56.86 ; -154.93,-26.07 -131.37,-49.63 -131.37,-56.86
  Inner3 w3.1: v1(-180.43,-464.78) -181,-464.21 -181,-435.8 -178.27,-433.07 -178.27,-427.08 -178.27,-424.33 -181,-421.6 -181,-399.32 -184.28,-396.05 -195.62,-396.05 -198.9,-392.77 -198.9,-386.22 -195.62,-382.95 -184.28,-382.95 -181,-379.67 -181,-373.12 -184.28,-369.84 -195.62,-369.84 -198.9,-366.57 -198.9,-360.02 -195.62,-356.74 -184.28,-356.74 -181,-353.47 -181,-294.51 -184.28,-291.24 -195.62,-291.24 -198.9,-287.96 -198.9,-281.41 -195.62,-278.13 -184.28,-278.13 -181,-274.86 -181,-271.75 -173.12,-263.86 -165.1,-255.84 -165.1,-234.9 -181.74,-218.26 -181.74,-195.26 -186,-191 -186,-176.35 -182.72,-173.07 -180.87,-173.07 -177.6,-169.8 -177.6,-163.25 -180.87,-159.97 -189.64,-159.97 -192.91,-156.7 -192.91,-150.14 -189.64,-146.87 -180.88,-146.87 -177.61,-143.59 -177.61,-137.04 -180.88,-133.77 -189.64,-133.77 -192.91,-130.49 -192.91,-123.94 -189.64,-120.67 -180.88,-120.67 -177.61,-117.39 -177.61,-110.84 -180.88,-107.56 -189.64,-107.56 -192.91,-104.29 -192.91,-97.74 -189.64,-94.46 -189.28,-94.46 -186,-91.19 -186,-67.17 -186,-49.23 -181.37,-44.59 -181.37,-39.19 -175.19,-33.01 -169.79,-33.01 -162.12,-25.35 -162.12,42.26 -168,48.13 v1(-168,50)
DDR_A2: U1.87 U2.M7 | length 888.7
  Top w3.63: U2.M7@-165.25,-538.25 -165.25,-543.41 -154.57,-554.09 -154.57,-579.43 -140.25,-593.75 v1(-140.25,-604.75) ; v1(-140.34,-185.65) -131.89,-177.19 U1.87@-131.89,-149.6
  Inner3 w3.1: v1(-140.34,-185.65) -140.34,-201.81 -143.79,-205.26 -143.79,-246.33 -139.55,-250.57 -139.55,-251.42 -139.55,-261.85 -142.83,-265.13 -144.26,-265.13 -147.53,-268.4 -147.53,-274.96 -144.26,-278.23 -126.6,-278.23 -123.32,-281.51 -123.32,-288.06 -126.6,-291.33 -144.26,-291.33 -147.53,-294.61 -147.53,-301.16 -144.26,-304.43 -126.6,-304.43 -123.32,-307.71 -123.32,-314.26 -126.6,-317.54 -144.26,-317.54 -147.53,-320.81 -147.53,-327.36 -144.26,-330.64 -139.83,-330.64 -136.55,-333.91 -136.55,-340.46 -139.83,-343.74 -144.26,-343.74 -147.53,-347.01 -147.53,-353.56 -144.26,-356.84 -126.6,-356.84 -123.32,-360.11 -123.32,-366.67 -126.6,-369.94 -144.26,-369.94 -147.53,-373.22 -147.53,-379.77 -144.26,-383.04 -126.6,-383.04 -123.32,-386.32 -123.32,-392.87 -126.6,-396.14 -144.26,-396.14 -147.53,-399.42 -147.53,-405.97 -144.26,-409.25 -126.6,-409.25 -123.32,-412.52 -123.32,-419.07 -126.6,-422.35 -133.74,-422.35 -137.01,-425.62 -137.01,-430.25 -130.27,-437 -130.27,-444.81 -127.45,-447.63 -127.45,-459.45 -133,-465 -141,-473 -141,-478.38 -144.28,-481.66 -147.72,-481.66 -151,-484.93 -151,-491.48 -147.72,-494.76 -131.08,-494.76 -127.8,-498.03 -127.8,-504.58 -131.08,-507.86 -147.72,-507.86 -151,-511.14 -151,-517.69 -147.72,-520.96 -131.08,-520.96 -127.8,-524.24 -127.8,-530.79 -131.08,-534.06 -147.72,-534.06 -151,-537.34 -151,-543.89 -147.72,-547.16 -131.08,-547.16 -127.8,-550.44 -127.8,-556.99 -131.08,-560.27 -147.72,-560.27 -151,-563.54 -151,-570.09 -147.72,-573.37 -144.28,-573.37 -141,-576.64 -141,-604 -140.6,-604.4 v1(-140.25,-604.75)
DDR_A3: U1.97 U2.N2 | length 880.4
  Top w3.63: -218.47,-453 -218.47,-471.52 -210.18,-479.81 v1(-196,-479.81) ; -218,-453 -208.09,-443.09 -187.91,-443.09 -178,-433.18 -178,-424.22 -183.11,-419.11 -183.11,-399.57 U2.N2@-200.79,-381.89 ; v1(-39,-178.66) -39,-176.94 -33.46,-171.41 U1.97@-33.46,-149.6
  Inner3 w3.1: v1(-39,-178.66) -39,-180.53 -33.11,-186.42 -33.11,-188.61 -28.45,-193.27 -28.45,-198 -28.45,-202.88 -25.17,-206.16 -21.72,-206.16 -18.45,-209.43 -18.45,-215.98 -21.72,-219.26 -33.07,-219.26 -36.35,-222.54 -36.35,-229.09 -33.07,-232.36 -21.72,-232.36 -18.45,-235.64 -18.45,-242.19 -21.72,-245.46 -33.07,-245.46 -36.35,-248.74 -36.35,-255.29 -33.07,-258.56 -21.72,-258.56 -18.45,-261.84 -18.45,-268.39 -21.72,-271.67 -35.17,-271.67 -38.45,-274.94 -38.45,-281.49 -35.17,-284.77 -21.72,-284.77 -18.45,-288.04 -18.45,-294.59 -21.72,-297.87 -25.17,-297.87 -28.45,-301.14 -28.45,-307.7 -25.17,-310.97 -21.72,-310.97 -18.45,-314.25 -18.45,-320.8 -21.72,-324.07 -33.07,-324.07 -36.35,-327.35 -36.35,-333.9 -33.07,-337.17 -31.72,-337.17 -28.45,-340.45 -28.45,-342 -28.45,-352.45 -36.35,-360.35 -36.35,-378.48 -24.07,-390.76 -24.07,-401 -24.07,-402.59 -27.34,-405.87 -33.07,-405.87 -36.35,-409.14 -36.35,-415.7 -33.07,-418.97 -27.34,-418.97 -24.07,-422.25 -24.07,-428.8 -27.34,-432.07 -29.07,-432.07 -32.35,-435.35 -32.35,-441.9 -29.07,-445.17 -27.34,-445.17 -24.07,-448.45 -24.07,-450 -24.07,-461.45 v1(-38.64,-476.02)
  Inner4 w3.09: v1(-196,-479.81) -180.35,-479.81 -163,-462.45 -163,-454.87 -149.59,-441.46 -133.63,-441.46 -127.83,-447.26 -127.83,-449.17 -119.97,-457.03 -119.97,-468.03 -115.46,-472.54 -105.3,-472.54 -103.75,-472.54 -100.48,-469.27 -100.48,-456.08 -97.21,-452.81 -90.67,-452.81 -87.39,-456.08 -87.39,-469.27 -84.12,-472.54 -43.41,-472.54 -41,-470.13